# EAGLE board openLRS-APM (EAGLE 7.2.0)
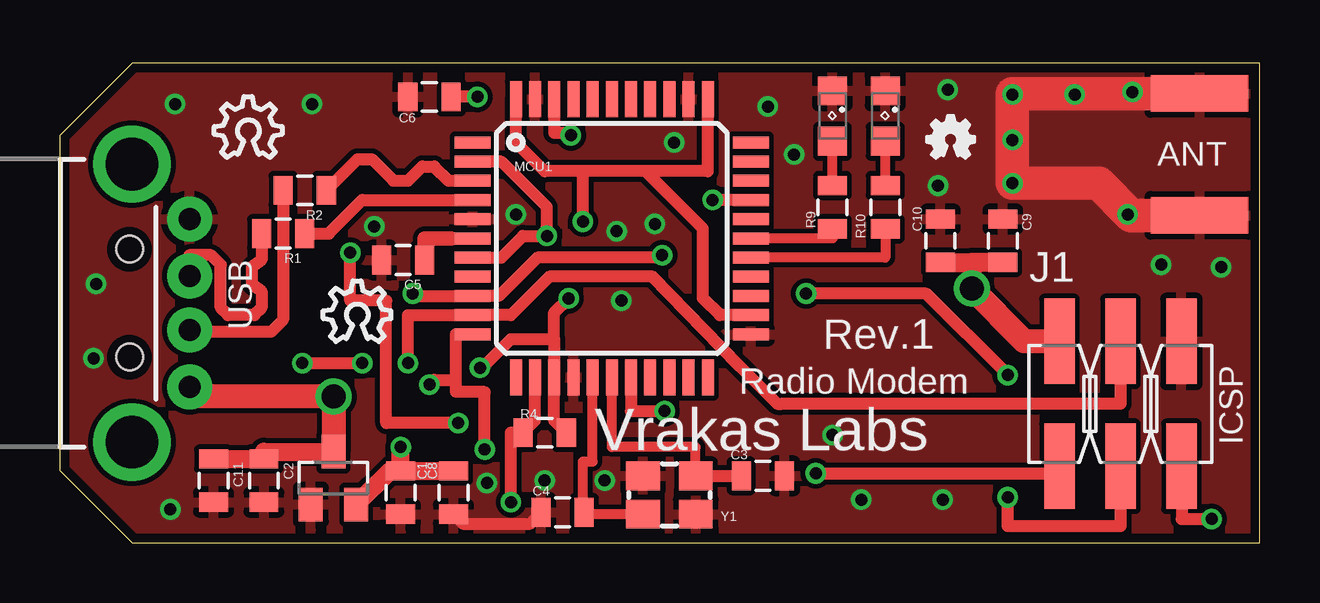
[diagram p0: board, top side]
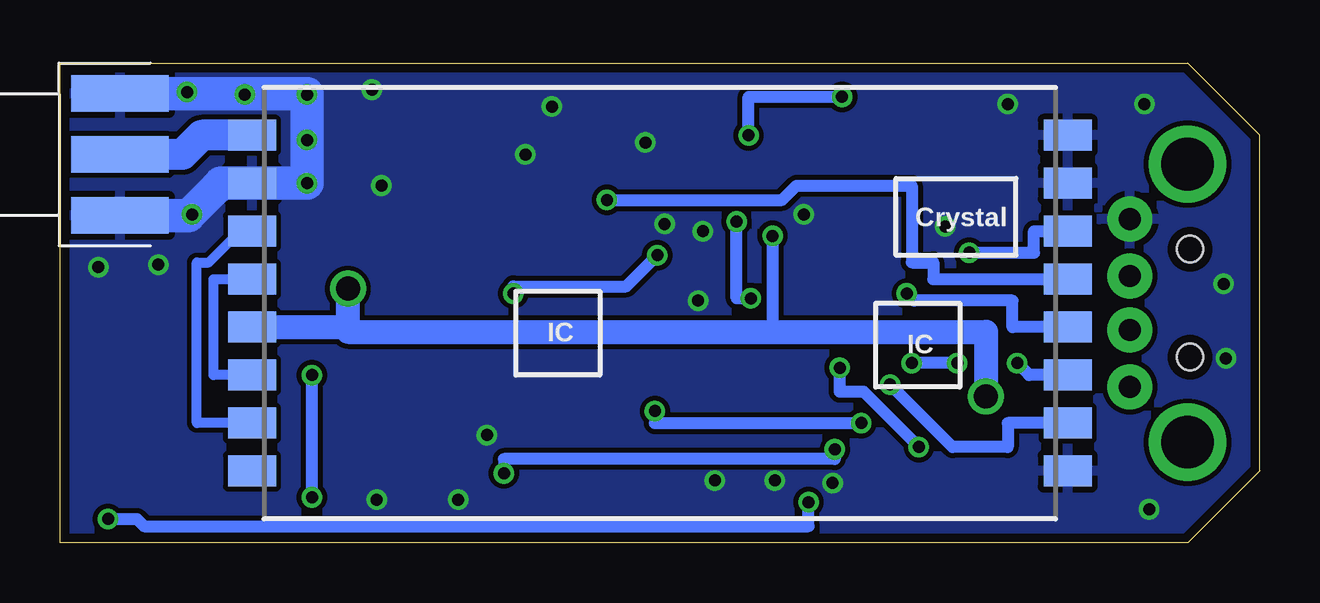
[diagram p1: board, bottom side, seen from below]

Size 50 x 20 mm. Coordinates in mm from the lower left corner, seen from the top.
Outline: 0,3 0,17 3,20 50,20 50,0 3,0 0,3
Copper layers (1*16): Top 0.0356mm / dielectric 1.5011mm / Bottom 0.0356mm
Design rules "oshpark-2layer": minimum track width 6mil, minimum drill 13mil, track to track 6mil, track to pad 6mil, pad to pad 6mil, via to via 6mil, smd to smd 6mil, copper to edge 15mil, drill to drill 6mil, minimum pad ring 7mil, minimum via ring 7mil, stop-mask expansion 4mil, vias tented up to drill 0mil, thermal gap 10mil
Net classes: 0 default: clearance 0.205 mm

## Footprints (pad centres in the part's own frame; a part is rotated, then mirrored left to right if it is on the bottom)
0805 = smd 0.8 x 1.2: 1 -0.9,0; 2 0.9,0
SOT23 = smd 1 x 1.4: 1 -0.95,-1.1; 2 0.95,-1.1; 3 0,1.1
RFM23BP-S2 = smd 2 x 1.3: 1 -17,7; 2 -17,5; 3 -17,3; 4 -17,1; 5 -17,-1; 6 -17,-3; 7 -17,-5; 8 -17,-7; 9 17,-7; 10 17,-5; 11 17,-3; 12 17,-1; 13 17,1; 14 17,3; 15 17,5; 16 17,7
M2X3_SMD = smd 1.27 x 3.56: 1 -2.54,-2.605; 2 -2.54,2.605; 3 0,-2.605; 4 0,2.605; 5 2.54,-2.605; 6 2.54,2.605
USB-A-H = drill 0.914 pad 1.88: D+ 2.4,1.127; D- 2.4,-1.127; GND 2.4,3.5; VBUS 2.4,-3.5 | drill 2.2: GND2 0,-5.8; GND3 0,5.8 | hole 1.1: -0.1,2.25; -0.1,-2.25
SML0805 = smd 1.2 x 1.2: A 1.05,0; C -1.05,0
SPARKFUN-DIGITALIC_TQFP44 = smd 1.5 x 0.5: 1 -5.8,4; 2 -5.8,3.2; 3 -5.8,2.4; 4 -5.8,1.6; 5 -5.8,0.8; 6 -5.8,0; 7 -5.8,-0.8; 8 -5.8,-1.6; 9 -5.8,-2.4; 10 -5.8,-3.2; 11 -5.8,-4; 23 5.8,-4; 24 5.8,-3.2; 25 5.8,-2.4; 26 5.8,-1.6; 27 5.8,-0.8; 28 5.8,0; 29 5.8,0.8; 30 5.8,1.6; 31 5.8,2.4; 32 5.8,3.2; 33 5.8,4 | smd 0.5 x 1.5: 12 -4,-5.8; 13 -3.2,-5.8; 14 -2.4,-5.8; 15 -1.6,-5.8; 16 -0.8,-5.8; 17 0,-5.8; 18 0.8,-5.8; 19 1.6,-5.8; 20 2.4,-5.8; 21 3.2,-5.8; 22 4,-5.8; 34 4,5.8; 35 3.2,5.8; 36 2.4,5.8; 37 1.6,5.8; 38 0.8,5.8; 39 0,5.8; 40 -0.8,5.8; 41 -1.6,5.8; 42 -2.4,5.8; 43 -3.2,5.8; 44 -4,5.8
LINX-SMA = smd 4.064 x 1.524 bottom: GND1 0,2.54; GND2 0,-2.54 | smd 4.064 x 1.524: GND3 0,-2.54; GND4 0,2.54; RF 0,0
CRYSTAL-SMD-5X3 = smd 1.4 x 1.2: 1 -1.1,-0.8; 2 1.1,-0.8; 3 1.1,0.8; 4 -1.1,0.8

## Placement (x,y rotation side)
C1  1uF  [0805]  14.2,2.1 270 top
C2  1uF  [0805]  8.5,2.6 270 top
C3  12pF  [0805]  29.3,2.8 0 top
C4  12pF  [0805]  20.95,1.27 180 top
C5  1uF  [0805]  14.3,11.8 180 top
C6  100n  [0805]  15.4,18.6 0 top
C8  100n  [0805]  16.4,2.1 270 top
C9  1uF  [0805]  39.3,12.6 90 top
C10  100n  [0805]  36.7,12.6 90 top
C11  100n  [0805]  6.4,2.6 270 top
IC1  MCP1703CB  [SOT23]  11.4,2.7 0 top
IC2  RFM23BPSMD  [RFM23BP-S2]  25,10 0 bottom
J1  CON_HEADER_PRG_AVR_ICSP-SMD  [M2X3_SMD]  44.2,5.8 0 top
JP1  USB-A-H  [USB-A-H]  3,10 0 top
LED1  RED  [SML0805]  32.2,17.8 270 top
LED2  GRN  [SML0805]  34.4,17.8 270 top
MCU1  ATMEGA32U4TQFP  [SPARKFUN-DIGITALIC_TQFP44]  23,12.7 0 top
R1  22  [0805]  9.3,12.9 180 top
R2  22  [0805]  10.2,14.7 180 top
R4  10k  [0805]  20.2,4.6 0 top
R9  220  [0805]  32.2,14 270 top
R10  220  [0805]  34.4,14 270 top
U$1  [OSHW_FILLX70_NOTEXT]  36.13,16.05 0 top
U$2  [OSHW_8X100_NOTEXT]  6.43,16.07 0 top
U$3  [OSHW_8X100_NOTEXT]  10.97,8.39 0 top
U$4  LINX-SMA  [LINX-SMA]  47.5,16.2 180 bottom
Y1  16MHz  [CRYSTAL-SMD-5X3]  25.4,2 0 top

## Library data of the parts
C1-C6 C8-C11 = SparkFun-Capacitors
IC1 = linear
IC2 = RFM23
J1 = dp_devices
JP1 = SparkFun-Connectors
LED1 LED2 = led
MCU1 = SparkFun-DigitalIC
R1 R2 R4 R9 R10 = SparkFun-Resistors
U$1-U$3 = ohw-logo
U$4 = OpenLRS-APM
Y1 = crystal_3225

## Nets
3V: C1.1 C8.1 IC1.2 MCU1.14 MCU1.24 MCU1.34 MCU1.44 R4.2
5V: C2.1 C9.1 C10.1 C11.1 IC1.3 IC2.5 J1.2 JP1.VBUS MCU1.2 MCU1.7
/RESET: J1.5 MCU1.13 R4.1
CS: IC2.13 MCU1.30
D_N [USB]: MCU1.3 R2.1
D_P [USB]: MCU1.4 R1.1
GND: C1.2 C2.2 C3.2 C4.2 C5.2 C6.1 C8.2 C9.2 C10.2 C11.2 IC1.1 IC2.2 IC2.9 IC2.15 IC2.16 J1.6 JP1.GND LED1.C LED2.C MCU1.5 MCU1.15 MCU1.23 MCU1.35 MCU1.43 U$4.GND1 U$4.GND2 U$4.GND3 U$4.GND4 Y1.2 Y1.4
IRQ: IC2.14 MCU1.18
MISO: IC2.10 J1.1 MCU1.11
MOSI: IC2.11 J1.4 MCU1.10
N$1: IC2.3 IC2.7
N$2: IC2.4 IC2.6
N$3: C6.2 MCU1.42
N$7: MCU1.28 R9.2
N$8: MCU1.27 R10.2
N$9: LED2.A R10.1
N$10: LED1.A R9.1
N$11: C3.1 MCU1.17 Y1.3
N$12: C4.1 MCU1.16 Y1.1
N$13: IC2.1 U$4.RF
R_N [USB]: JP1.D- R2.2
R_P [USB]: JP1.D+ R1.2
SCK: IC2.12 J1.3 MCU1.9
UCAP: C5.1 MCU1.6

## Tracks (layer width: path | path; a pad name or v marks a point on that pad's centre or on a via)
3V  (via drill 0.5)
  Top 0.5: MCU1.34 27,15.5 24.4,15.5 | 20.6,7 MCU1.14 | 24.4,15.5 21.8,15.5 | 21.8,15.5 20.2,15.5 19,16.7 MCU1.44 | v17.5,7.3 17.6,7.3 18.8,8.5 20.6,8.5 | 20.6,8.5 MCU1.14 | 20.6,8.5 20.6,9.6 v21.2,10.2 | v21.8,13.4 21.8,15.5 | MCU1.24 27.5,9.5 26.8,10.2 26.8,13.1 24.4,15.5 | R4.2 20.6,5.1 MCU1.14
  Top 0.75: IC1.2 13.75,3 C1.1 | C1.1 C8.1 | C1.1 v14.2,4
  Bottom 0.5: v14.2,4 16.5,6.3 17.5,6.3 v17.5,7.3 | v21.2,10.2 21.8,10.2 v21.8,13.4
5V  (via drill 0.5, 1)
  Top 0.5: MCU1.7 18.4,11.9 19.3,12.8 v20.3,12.8 20.3,14 18.4,15.9 MCU1.2
  Top 0.75: IC1.3 8.5,3.8 C2.1 C11.1
  Top 0.8: C10.1 38,11.7 | C9.1 38,11.7 | 38,11.7 v38,10.6
  Top 1: JP1.VBUS 5.4,6.1 v11.4,6.1 IC1.3 | J1.2 40.2,8.4 v38,10.6
  Bottom 0.5: v20.3,12.8 20.3,8.8
  Bottom 1: IC2.5 38,9 | 38,9 38,8.8 20.3,8.8 11.4,8.8 v11.4,6.1 | 38,9 v38,10.6
/RESET  (via drill 0.5)
  Top 0.5: J1.5 46.76,1 v48,1 | v18.8,1.7 18.8,4.6 R4.1 19.8,5.1 MCU1.13
  Bottom 0.5: v48,1 46.8,1 46.5,0.7 18.8,0.7 v18.8,1.7
CS  (via drill 0.5)
  Top 0.5: MCU1.30 v27.2,14.3
  Bottom 0.5: v27.2,14.3 19.9,14.3 19.3,14.9 14.5,14.9 14.5,11.7 13.6,11.7 13.6,11 IC2.13
D_N
  Top 0.5: R2.1 12.4,16 13,16 13.9,15.1 14.5,15.1 15.1,15.7 15.6,15.7 16.2,15.1 MCU1.3
D_P
  Top 0.5: R1.1 11.2,12.9 12.6,14.3 MCU1.4
GND  (via drill 0.5)
  Top 0.5: C8.2 16.8,0.8 19.6,0.8 20.05,1.25 C4.2
  Top 1.4: U$4.GND3 39.7,18.74 v39.7,18.7 v39.7,15 43.3,15 44.64,13.66 U$4.GND1
  Bottom 1.4: U$4.GND3 39.7,18.74 v39.7,15 IC2.2 43.3,15 | U$4.GND1 44.64,13.66 43.5,14.8
  other vias: 13.1,13.2 24.8,13.3 37,18.9 32.2,4.5 22.7,2.6 20.2,2.6 19,13.7 25.6,16.7 10.5,18.3 17.8,2.5 4.8,18.3 4.6,1.4 1.5,10.8 1.4,7.7 36.8,1.8 33.4,1.8 30.6,16.2 29.5,18.2 23.2,13 23.4,10.1 48.4,11.5 39.7,16.8 42.3,18.7 44.7,18.8 45.9,11.6 44.5,13.7 36.6,14.9
  pour Top: 50,20 50,0 0,0 0,20
  pour Bottom: 50,20 50,0 0,0 0,20
IRQ  (via drill 0.5)
  Top 0.5: MCU1.18 23.8,5.5 v25.2,5.5 | v16.6,5 13.6,5 13.6,10.1 12.1,10.1 v12.1,12.1
  Bottom 0.5: v25.2,5.5 25.2,5 v16.6,5 | v12.1,12.1 9.4,12.1 9.4,13 IC2.14
MISO  (via drill 0.5)
  Top 0.5: J1.1 41.66,2.9 v31.5,2.9 | v17.7,3.9 17.7,6.29 16.5,6.3 16.5,6.8 | 16.5,6.8 16.5,8.7 MCU1.11 | v15.4,6.6 15.6,6.8 16.5,6.8
  Bottom 0.5: v17.7,3.9 17.7,3.5 31.5,3.5 v31.5,2.9 | IC2.10 10.5,5 10.5,4 12.8,4 v15.4,6.6
MOSI  (via drill 0.5)
  Top 0.5: J1.4 44.2,5.8 30.2,5.8 30.1,5.8 29.9,5.8 28.3,7.4 24.7,11.1 20.4,11.1 18.8,9.5 MCU1.10 14.5,9.5 v14.5,7.5 | v10.1,7.5 v12.6,7.5
  Bottom 0.5: IC2.11 9.6,7 v10.1,7.5 | v12.6,7.5 v14.5,7.5
N$1
  Bottom 0.406: IC2.7 44.3,5 44.3,11.7 43.8,11.7 42.8,12.7 42,12.7 IC2.3
N$2
  Bottom 0.406: IC2.6 43.6,7 43.6,11 IC2.4
N$3  (via drill 0.5)
  Top 0.5: MCU1.42 20.6,17.1 21.3,17.1 v21.3,17 | v17.4,18.6 C6.2
  Bottom 0.5: v21.3,17 21.3,18.6 v17.4,18.6
N$7
  Top 0.406: R9.2 32.2,12.7 MCU1.28
N$8
  Top 0.406: R10.2 34.4,11.9 MCU1.27
N$9
  Top 0.406: R10.1 LED2.A
N$10
  Top 0.406: R9.1 LED1.A
N$11
  Top 0.406: Y1.3 26.49,4 23,4 MCU1.17
  Top 0.5: Y1.3 C3.1
N$12
  Top 0.406: MCU1.16 22.2,3.4 21.8,3.4 21.8,1.19 Y1.1 22.37,1.19 C4.1
N$13
  Bottom 1.3: IC2.1 44.1,17 44.9,16.2 U$4.RF
R_N
  Top 0.5: JP1.D- 5.4,8.8 8.8,8.8 9.3,9.3 R2.2
R_P
  Top 0.5: R1.2 8.4,11.8 8,11.5 8,10.8 8.4,10.5 8.4,9.8 8.1,9.5 7,9.5 6.7,9.8 6.7,11.6 6.3,12 5.4,12 JP1.D+
SCK  (via drill 0.5)
  Top 0.5: J1.3 44.2,0.7 39.5,0.7 v39.5,1.9 | v14.7,10.4 14.7,10.3 MCU1.9 18.3,10.3 19.9,11.9 25.1,11.9 v25.1,12 | v39.5,7 36.1,10.4 v31.1,10.4
  Bottom 0.5: IC2.12 10.3,9 10.3,10.1 14.4,10.1 v14.7,10.4 | v39.5,1.9 v39.5,7 | v31.1,10.4 31.1,10.7 26.4,10.7 v25.1,12
UCAP
  Top 0.5: MCU1.6 16.3,12.7
  Top 0.6: 16.3,12.7 15.2,12.7 C5.1

## Text on the board
tPlace: USB | Rev.1 | Radio Modem | Vrakas Labs | ICSP
tNames: ANT